# EAGLE board blitzbox (EAGLE 7.2.0)
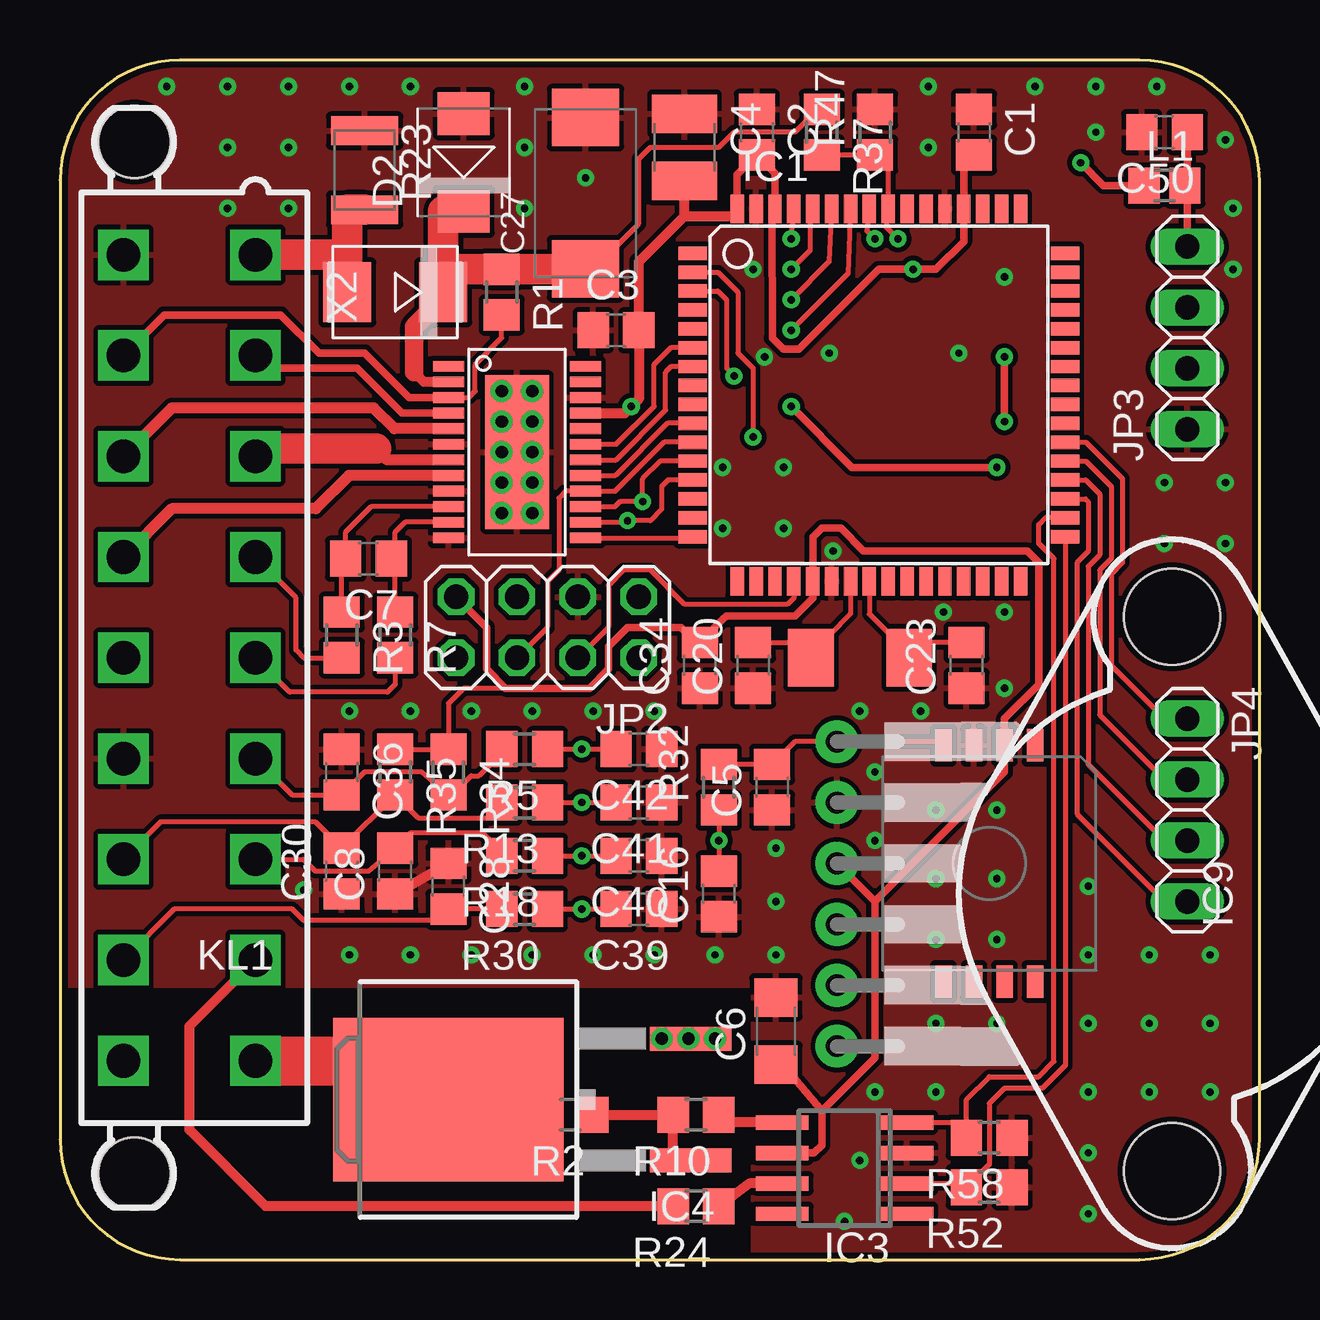
[diagram p0: board, top side]
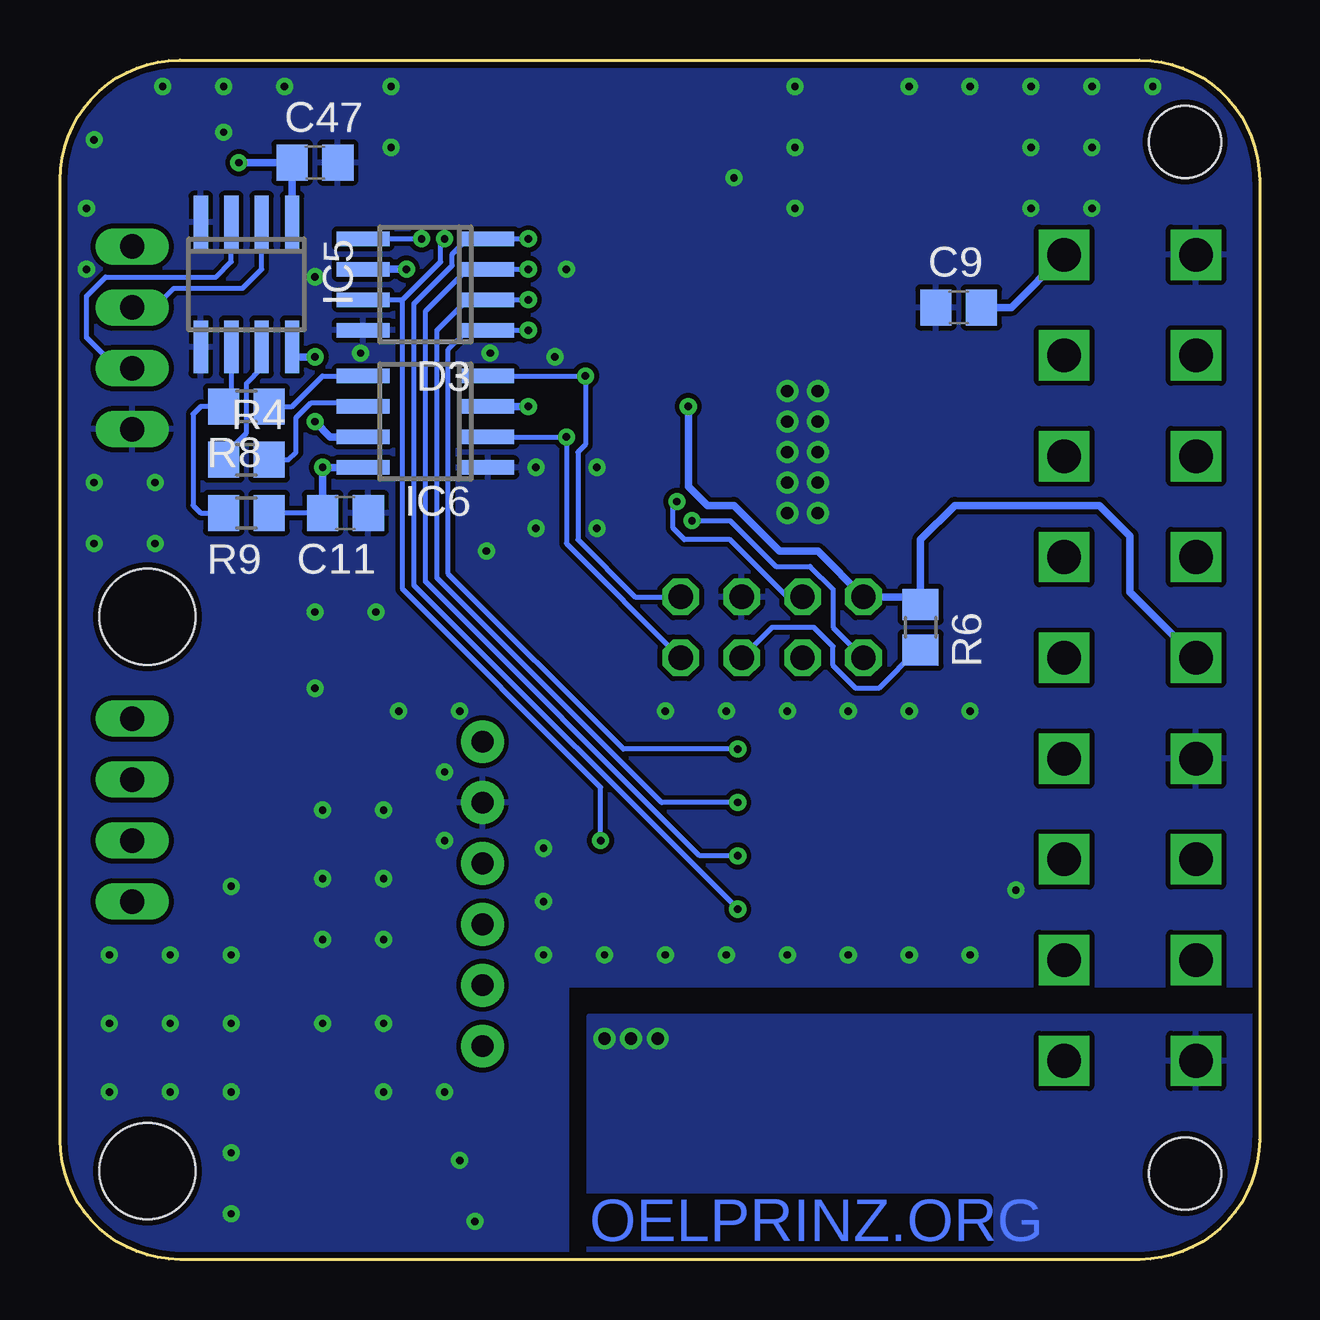
[diagram p1: board, bottom side, seen from below]

Size 50 x 50 mm. Coordinates in mm from the lower left corner, seen from the top.
Outline: 0,45 0,5 arc90 5,0 45,0 arc90 50,5 50,45 arc90 45,50 5,50 arc90 0,45
Copper layers (1*16): Top 0.035mm / dielectric 1.5mm / Bottom 0.035mm
Design rules "default *": minimum track width 8mil, minimum drill 12mil, track to track 8mil, track to pad 8mil, pad to pad 8mil, via to via 8mil, smd to smd 8mil, copper to edge 10mil, drill to drill 10mil, minimum pad ring 10mil, minimum via ring 8mil, stop-mask expansion 4mil, vias tented up to drill 0mil, thermal gap 8mil

## Footprints (pad centres in the part's own frame; a part is rotated, then mirrored left to right if it is on the bottom)
C0805 = smd 1.3 x 1.5: 1 -0.95,0; 2 0.95,0
C1210 = smd 1.6 x 2.7: 1 -1.4,0; 2 1.4,0
C1206 = smd 1.6 x 1.8: 1 -1.4,0; 2 1.4,0
SMC_D = smd 2.4 x 2.8: + -3.15,0; - 3.15,0
MURS120 = smd 2 x 2.5: 1 -2,0; 2 2,0
SMBJ = smd 1.78 x 2.16: A 2.04,0; C -2.03,0
SO08 = smd 0.6 x 2.2: 1 -1.905,-2.6; 2 -0.635,-2.6; 3 0.635,-2.6; 4 1.905,-2.6; 5 1.905,2.6; 6 0.635,2.6; 7 -0.635,2.6; 8 -1.905,2.6
TQFP64 = smd 1.194 x 0.559: 1 -7.76,5.905; 2 -7.76,5.118; 3 -7.76,4.331; 4 -7.76,3.543; 5 -7.76,2.756; 6 -7.76,1.968; 7 -7.76,1.181; 8 -7.76,0.394; 9 -7.76,-0.394; 10 -7.76,-1.181; 11 -7.76,-1.968; 12 -7.76,-2.756; 13 -7.76,-3.543; 14 -7.76,-4.331; 15 -7.76,-5.118; 16 -7.76,-5.905; 33 7.76,-5.905; 34 7.76,-5.118; 35 7.76,-4.331; 36 7.76,-3.543; 37 7.76,-2.756; 38 7.76,-1.968; 39 7.76,-1.181; 40 7.76,-0.394; 41 7.76,0.394; 42 7.76,1.181; 43 7.76,1.968; 44 7.76,2.756; 45 7.76,3.543; 46 7.76,4.331; 47 7.76,5.118; 48 7.76,5.905 | smd 0.559 x 1.194: 17 -5.905,-7.76; 18 -5.118,-7.76; 19 -4.331,-7.76; 20 -3.543,-7.76; 21 -2.756,-7.76; 22 -1.968,-7.76; 23 -1.181,-7.76; 24 -0.394,-7.76; 25 0.394,-7.76; 26 1.181,-7.76; 27 1.968,-7.76; 28 2.756,-7.76; 29 3.543,-7.76; 30 4.331,-7.76; 31 5.118,-7.76; 32 5.905,-7.76; 49 5.905,7.76; 50 5.118,7.76; 51 4.331,7.76; 52 3.543,7.76; 53 2.756,7.76; 54 1.968,7.76; 55 1.181,7.76; 56 0.394,7.76; 57 -0.394,7.76; 58 -1.181,7.76; 59 -1.968,7.76; 60 -2.756,7.76; 61 -3.543,7.76; 62 -4.331,7.76; 63 -5.118,7.76; 64 -5.905,7.76
TLE8080 = smd 0.45 x 1.3: 1 -3.575,-2.85; 2 -2.925,-2.85; 3 -2.275,-2.85; 4 -1.625,-2.85; 5 -0.975,-2.85; 6 -0.325,-2.85; 7 0.325,-2.85; 8 0.975,-2.85; 9 1.625,-2.85; 10 2.275,-2.85; 11 2.925,-2.85; 12 3.575,-2.85; 13 3.575,2.85; 14 2.925,2.85; 15 2.275,2.85; 16 1.625,2.85; 17 0.975,2.85; 18 0.325,2.85; 19 -0.325,2.85; 20 -0.975,2.85; 21 -1.625,2.85; 22 -2.275,2.85; 23 -2.925,2.85; 24 -3.575,2.85 | smd 6.4 x 2.65: 25 0,0
SO-08 = smd 0.6 x 2.2: 1 -1.905,-2.6; 2 -0.635,-2.6; 3 0.635,-2.6; 4 1.905,-2.6; 5 1.905,2.6; 6 0.635,2.6; 7 -0.635,2.6; 8 -1.905,2.6
TO263 = smd 1 x 3.4: 1 -2.54,-6.6; 2 2.54,-6.6 | smd 6.8 x 9.6: 3 0,3.5
MPXH6400 = smd 1.346 x 0.686: 1 -4.921,1.905; 2 -4.921,0.635; 3 -4.921,-0.635; 4 -4.921,-1.905; 5 4.921,-1.905; 6 4.921,-0.635; 7 4.921,0.635; 8 4.921,1.905
MPX4250 = drill 0.9 pad 1.778: 1 -6.35,-13.97; 2 -3.81,-13.97; 3 -1.27,-13.97; 4 1.27,-13.97; 5 3.81,-13.97; 6 6.35,-13.97 | hole 4: 11.555,0; -11.555,0
2X04 = drill 1.016 octagon: 1 -3.81,-1.27; 2 -3.81,1.27; 3 -1.27,-1.27; 4 -1.27,1.27; 5 1.27,-1.27; 6 1.27,1.27; 7 3.81,-1.27; 8 3.81,1.27
1X04 = drill 1.016 long: 1 -3.81,0; 2 -1.27,0; 3 1.27,0; 4 3.81,0
FB805 = smd 1.3 x 1.5: 1 -0.85,0; 2 0.85,0
ABM3 = smd 1.9 x 2.4: 1 -2.05,0; 2 2.05,0
R0805 = smd 1.3 x 1.5: 1 -0.95,0; 2 0.95,0
CT/CN1210 = smd 1.2 x 2.8: 1 -1.65,0; 2 1.65,0
5566-18 = drill 1.4 square: 1 16.8,-2.75; 2 12.6,-2.75; 3 8.4,-2.75; 4 4.2,-2.75; 5 0,-2.75; 6 -4.2,-2.75; 7 -8.4,-2.75; 8 -12.6,-2.75; 9 -16.8,-2.75; 10 16.8,2.75; 11 12.6,2.75; 12 8.4,2.75; 13 4.2,2.75; 14 0,2.75; 15 -4.2,2.75; 16 -8.4,2.75; 17 -12.6,2.75; 18 -16.8,2.75 | hole 3: 21.5,2.29; -21.5,2.29

## Placement (x,y rotation side)
C1  100n  [C0805]  38.1,46.99 270 top
C2  100n  [C0805]  29.05,46.99 270 top
C3  100n  [C0805]  23.18,38.73 0 top
C4  22u  [C1210]  26.04,46.35 270 top
C5  1n  [C0805]  29.69,19.68 90 top
C6  22u  [C1206]  29.84,9.53 90 top
C7  1n  [C0805]  12.86,29.21 180 top
C8  1n  [C0805]  13.97,16.19 90 top
C9  1n  [C0805]  12.54,39.69 0 bottom
C11  100n  [C0805]  38.1,31.11 180 bottom
C16  220n  [C0805]  27.46,15.24 90 top
C20  18p  [C0805]  28.89,24.77 90 top
C23  18p  [C0805]  37.78,24.77 90 top
C27  TAJD336*035#NJ  [SMC_D]  21.91,44.45 90 top
C28  1n  [C0805]  16.19,15.56 270 top
C30  1n  [C0805]  11.75,16.19 90 top
C34  100n  [C0805]  26.67,24.77 90 top
C36  1n  [C0805]  11.75,20.32 270 top
C39  220n  [C0805]  24.13,14.61 180 top
C40  220n  [C0805]  24.13,16.83 180 top
C41  1u  [C0805]  24.13,19.05 180 top
C42  1u  [C0805]  24.13,21.27 180 top
C47  1u  [C0805]  39.37,45.72 0 bottom
C50  1n  [C0805]  46.04,46.99 180 top
D1  MURS120  [MURS120]  13.97,40.32 0 top
D2  SMBJ22A  [SMBJ]  16.83,45.72 90 top
D3  DA112S1  [SO08]  34.77,40.64 90 bottom
IC1  ATMEGA2561-16AU  [TQFP64]  34.13,36.04 0 top
IC2  TLE8080  [TLE8080]  19.05,33.66 270 top
IC3  MCP14E10  [SO-08]  32.7,3.81 90 top
IC4  FGB3056_F085  [TO263]  19.68,6.67 90 top
IC5  USB6B1  [SO08]  42.23,40.64 180 bottom
IC6  PL2303SA  [SO-08]  34.77,34.92 90 bottom
IC8  MPXH6400AC6T1  [MPXH6400]  38.73,16.51 270 top
IC9  MPX4250  [MPX4250]  46.35,15.24 270 top
JP2  [2X04]  20.32,26.35 180 top
JP3  USB  [1X04]  46.99,38.42 90 top
JP4  [1X04]  46.99,18.73 270 top
L1  L0805C100MDWIT  [FB805]  46.04,44.77 0 top
Q1  ABM3-16.000MHZ-D2Y-T  [ABM3]  33.35,25.08 0 top
R1  1k  [R0805]  18.41,40.32 270 top
R2  0R(NC)  [R0805]  21.27,6.03 180 top
R3  10k  [R0805]  11.75,26.04 270 top
R4  27R  [R0805]  42.23,33.34 0 bottom
R5  1k  [R0805]  19.37,21.27 180 top
R6  10k  [R0805]  14.13,26.35 270 bottom
R7  10k  [R0805]  13.97,26.04 270 top
R8  27R  [R0805]  42.23,35.56 180 bottom
R9  1k5*  [R0805]  42.23,31.11 180 bottom
R10  220R  [R0805]  26.51,6.03 180 top
R13  1k  [R0805]  19.37,19.05 180 top
R18  1k  [R0805]  19.37,16.83 180 top
R23  B72530V1140S262  [CT/CN1210]  12.7,45.4 270 top
R24  220R  [R0805]  26.51,2.22 180 top
R30  1k  [R0805]  19.37,14.61 180 top
R32  1k  [R0805]  27.46,19.68 90 top
R34  2k49  [R0805]  16.19,20.32 270 top
R35  2k49  [R0805]  13.97,20.32 270 top
R37  39k  [R0805]  31.75,46.99 270 top
R47  10k  [R0805]  33.97,46.99 90 top
R52  39k  [R0805]  38.73,3.02 180 top
R58  39k  [R0805]  38.73,5.08 180 top
X2  5566-18  [5566-18]  5.4,25.08 90 top

## Library data of the parts
C1-C9 C11 C16 C20 C23 C27 C28 C30 C34 C36 C39-C42 C47 C50 R1-R10 R13 R18 R24 R30 R32 R34 R35 R37 R47 R52 R58 = rcl
D1 = murs120
D2 = diode
D3 = st-microelectronics; MF: Arrow Electronics; MPN: DA112S1; OC_FARNELL: 9802223; OC_NEWARK: 89K0514
IC1 = atmel-2005
IC2 = tle8080
IC3 = mcp14e10
IC4 = FGB3056_F085
IC5 = st-microelectronics; MPN: USB6B1; OC_FARNELL: 9804358; OC_NEWARK: 26M4750
IC6 = PL2303SA
IC8 = MPXH6400
IC9 = mpx4250
JP2-JP4 = pinhead
L1 = dp_devices
Q1 = ABM3
R23 = varistor
X2 = con-molex; OC_FARNELL: unknown; OC_NEWARK: unknown

## Nets
3V3: C11.2 IC6.3 IC6.8 R9.1
!RST: IC1.20 JP2.4 R6.2
+5V: C1.2 C2.2 C3.2 C4.2 C6.1 C34.2 D3.6 IC1.21 IC1.52 IC1.62 IC1.64 IC2.21 IC3.6 IC8.2 IC9.3 JP2.7 R6.1 R34.1 R35.1 X2.14
+5VU: C50.1 JP3.4 L1.2
+12V: C27.+ D1.2 D2.C IC2.2 R1.1 R37.1
+UB: C9.2 D1.1 R23.2 X2.1
AD_BAT: D3.5 IC1.56 R37.2 R47.1
AD_CLT: C42.2 D3.1 IC1.58 R5.1
AD_IAT: C41.2 D3.2 IC1.59 R13.1
AD_MAP: C16.2 D3.7 IC1.57 R32.1
AD_TPS: C39.2 D3.4 IC1.61 R30.1
AD_WBL: C40.2 D3.3 IC1.60 R18.1
BP_OUT: IC2.4 X2.2
CLT: C36.2 R5.2 R34.2 X2.6
CRANK: IC1.16 IC2.13
CS: IC1.10 IC2.17
D+: IC5.3 JP3.2
D-: IC5.2 JP3.3
DA+: IC5.6 R8.2 R9.2
DA-: IC5.7 R4.1
GND: C1.1 C2.1 C3.1 C4.1 C5.1 C6.2 C8.1 C9.1 C11.1 C16.1 C20.1 C23.1 C27.- C28.1 C30.1 C34.1 C36.1 C39.1 C40.1 C41.1 C42.1 C47.2 C50.2 D2.A D3.8 IC1.22 IC1.53 IC1.63 IC2.6 IC2.9 IC2.12 IC2.22 IC2.25 IC3.3 IC5.4 IC5.5 IC6.1 IC8.3 IC9.2 JP2.3 JP3.1 R23.1 R47.2 R52.1 R58.1 X2.10 X2.15
GND1: IC4.2 X2.18
IAT: C30.2 R13.2 R35.2 X2.16
IDV_OUT: IC2.7 X2.3
IGN: IC4.1 R2.1 R10.2
IGNA: IC1.34 IC3.4 R58.2
IGNA_OUT: IC4.3 R2.2 X2.9
IGNB: IC1.33 IC3.2 R52.2
IGNB_OUT: R24.2 X2.8
INJA: IC1.7 IC2.18
INJA_OUT: IC2.8 X2.13
INJB: IC1.6 IC2.19
INJB_OUT: IC2.5 X2.12
MAP: C5.2 IC8.4 IC9.1 R32.2
MISO: IC1.13 IC2.14 JP2.8
MOSI: IC1.12 IC2.15 JP2.5
N$1: C7.1 IC2.11 R7.1
N$2: IC3.5 R10.1
N$5: IC6.6 R4.2
N$6: IC6.5 R8.1
N$7: IC1.38 JP4.1
N$9: IC1.37 JP4.2
N$11: IC1.36 JP4.3
N$12: IC1.35 JP4.4
N$14: C7.2 IC2.10 R3.1
N$22: IC3.7 R24.1
RXD: IC1.2 IC6.2 JP2.2
RXD2: IC1.27
SCK: IC1.11 IC2.16 JP2.6
TACH_OUT: IC2.3 R1.2 X2.11
TPS: C28.2 R30.2 X2.17
TXD: IC1.3 IC6.4 JP2.1
TXD2: IC1.28
VR+: R3.2 X2.4
VR-: R7.2 X2.5
VU: C47.1 IC5.1 L1.1
VUA: IC5.8 IC6.7
WBL: C8.2 R18.2 X2.7
XTAL1: C20.2 IC1.23 Q1.1
XTAL2: C23.2 IC1.24 Q1.2

## Tracks (layer width: path | path; a pad name or v marks a point on that pad's centre or on a via)
3V3  (via drill 0.3)
  Top 0.305: v30.48,35.56 33.02,33.02 v39.05,33.02
  Bottom 0.203: C11.2 R9.1
  Bottom 0.305: IC6.8 v39.05,33.02 C11.2 | IC6.3 v30.48,35.56
!RST
  Top 0.203: JP2.4 22.86,26.35 22.86,28.1 23.5,28.73 24.61,28.73 26.04,27.3 30.32,27.3 30.59,27.57 IC1.20
  Bottom 0.203: R6.2 14.29,25.4 15.88,23.81 16.83,23.81 17.78,24.77 17.78,25.56 18.57,26.35 20.32,26.35 JP2.4
+5V  (via drill 0.3)
  Top 0.203: R35.1 R34.1 16.19,23.18 16.83,23.81 18.57,23.81
  Top 0.305: IC9.3 33.97,14.92 | 33.97,14.92 39.37,20.32 IC8.2 39.37,22.54 40.8,23.97 40.8,29.05 40.32,29.53 33.5,29.53 32.54,30.48 31.75,30.48 31.38,30.11 IC1.21 31.38,27.57 30.64,26.83 27.78,26.83 27.62,26.67 C34.2 26.19,26.04 25.88,26.35 23.65,26.35 22.86,25.56 22.86,24.61 22.07,23.81 18.57,23.81 17.78,24.61 17.78,26.35 JP2.7 | IC3.6 31.43,4.45 31.75,4.76 31.75,6.19 | 24.13,38.41 C3.2 | 31.75,6.19 33.97,8.41 33.97,14.92 | C1.2 37.67,45.62 IC1.52 37.67,42.44 36.51,41.27 v35.56,41.27 34.13,41.27 30.8,37.94 30.16,37.94 29.7,38.41 29.69,43.5 29.8,43.61 IC1.62 29.8,45.29 C2.2 28.23,45.22 IC1.64 28.26,43.76 28.26,43.5 | 31.75,6.19 30.16,8.1 C6.1
  Top 0.406: IC2.21 23.53,35.28 v23.81,35.56 24.13,35.88 C3.2 24.13,41.59 26.04,43.5 | 26.04,43.5 C4.2 | 26.04,43.5 28.26,43.5
  Bottom 0.305: v23.81,35.56 23.81,32.23 23.02,31.43 21.91,31.43 20,29.53 18.41,29.53 JP2.7 14.45,27.62 R6.1 14.13,30 12.7,31.43 6.67,31.43 5.4,30.16 5.4,27.83 X2.14 | D3.6 v35.56,41.27
+5VU
  Top 0.305: JP3.4 46.99,44.66 L1.2 46.99,44.87 C50.1
+12V
  Top 0.203: R37.1 31.59,47.94 30.64,46.99 28.1,46.99 27.46,46.35 24.61,46.35 24.13,45.88 24.13,43.18 22.25,41.3 | C27.+ 22.25,41.3 | 22.25,41.3 22.23,41.27
  Top 0.406: IC2.2 15.17,36.58 14.76,36.99
  Top 0.762: 14.76,36.99 14.76,38.89 15.97,40.1 D1.2
  Top 1.27: D2.C 15.97,43.69 15.97,41.27 | 15.97,41.27 D1.2 | 15.97,41.27 R1.1 21.91,41.27 C27.+
+UB
  Top 1.27: 11.97,39.7 D1.1 11.97,41.88 | R23.2 11.97,43.75 11.97,41.88 | X2.1 11.97,41.88
  Bottom 0.305: C9.2 10.34,39.69 X2.1
AD_BAT  (via drill 0.3)
  Top 0.203: R37.2 R47.1 34.52,45.49 IC1.56 34.42,43.05 v34.92,42.55
  Bottom 0.203: D3.5 v34.92,42.55
AD_CLT  (via drill 0.3)
  Top 0.203: R5.1 v21.75,21.27 C42.2 | IC1.58 32.85,41.1 v30.48,38.73
  Bottom 0.203: v21.75,21.27 26.51,21.27 33.81,28.57 33.81,37.94 33.02,38.73 D3.1 v30.48,38.73
AD_IAT  (via drill 0.3)
  Top 0.203: R13.1 v21.75,19.05 C41.2 | IC1.59 32.06,41.58 v30.48,40.01
  Bottom 0.203: v21.75,19.05 24.92,19.05 34.29,28.42 34.29,38.73 33.02,40.01 D3.2 v30.48,40.01
AD_MAP  (via drill 0.3)
  Top 0.203: IC1.57 33.63,42.88 v33.97,42.55 | R32.1 v27.46,17.46 C16.2
  Bottom 0.203: v27.46,17.46 27.46,19.68 35.72,27.94 35.72,40.01 | D3.7 35.72,40.01 | 35.72,40.01 34.13,41.59 34.13,42.39 v33.97,42.55
AD_TPS  (via drill 0.3)
  Top 0.203: R30.1 v21.75,14.61 C39.2 | IC1.61 30.48,42.86 v30.48,42.55
  Bottom 0.203: v21.75,14.61 35.24,28.1 35.24,39.85 33.66,41.43 33.66,41.91 33.02,42.55 D3.4 v30.48,42.55
AD_WBL  (via drill 0.3)
  Top 0.203: R18.1 v21.75,16.83 C40.2 | v30.48,41.27 31.27,42.07 31.27,43.71 IC1.60
  Bottom 0.203: v21.75,16.83 23.34,16.83 34.77,28.26 34.77,39.53 33.02,41.27 D3.3 v30.48,41.27
BP_OUT
  Top 0.305: IC2.4 14.25,35.28 12.38,37.15 8.68,37.15 X2.2
CLT
  Top 0.203: X2.6 8.17,20.88 9.68,19.37 C36.2 12.7,20.32 15.08,20.32 R34.2 16.35,19.37 17.14,20.16 17.46,20.16 18.42,21.12 R5.2
CRANK
  Top 0.203: IC2.13 26.14,30.08 IC1.16
CS
  Top 0.203: IC2.17 23.16,32.68 25.33,34.85 IC1.10
D+
  Bottom 0.203: JP3.2 47.62,37.15 48.9,38.42 48.9,40.16 48.1,40.96 43.5,40.96 42.86,41.59 IC5.3
D-
  Bottom 0.203: JP3.3 46.04,39.69 45.24,40.48 42.39,40.48 41.59,41.27 IC5.2
DA+
  Bottom 0.203: R9.2 44.13,31.11 44.45,31.43 44.45,35.24 44.13,35.56 R8.2 42.86,35.88 IC5.6
DA-
  Bottom 0.203: R4.1 43.18,33.5 42.23,34.45 42.23,36.51 41.59,37.15 IC5.7
GND  (via drill 0.3, 0.51)
  Top 0.406: C8.1 C28.1
  other vias: 18.41,36.2 19.68,36.2 18.41,34.92 19.68,34.92 19.68,33.66 18.41,33.66 18.41,32.38 19.68,32.38 19.68,31.11 18.41,31.11 6.99,43.81 4.45,48.9 6.99,46.35 6.99,48.9 9.53,48.9 9.53,46.35 12.06,48.9 9.53,43.81 14.61,48.9 19.37,48.9 36.2,48.9 40.64,48.9 43.18,48.9 45.72,48.9 48.58,46.67 48.9,43.81 48.9,41.27 48.58,32.38 48.58,29.84 46.04,29.84 47.94,12.7 47.94,9.84 47.94,6.99 45.4,12.7 42.86,15.56 45.4,9.84 42.86,9.84 46.04,32.38 45.4,6.99 29.84,17.14 29.84,14.92 29.84,12.7 27.3,12.7 24.77,12.7 22.23,12.7 19.68,12.7 17.14,12.7 14.61,12.7 12.06,12.7 24.77,22.86 22.23,22.86 19.68,22.86 14.61,22.86 12.06,22.86 21.91,45.09 19.37,46.35 19.37,43.81 43.18,46.99 36.2,46.35 39.05,18.73 36.51,15.88 39.05,15.88 36.51,13.34 39.05,13.34 36.51,18.73 39.37,23.81 39.37,26.99 33.34,22.86 35.88,22.86 33.97,20.32 33.97,17.46 36.51,9.84 39.05,9.84 36.51,6.99 33.34,4.13 33.97,6.99 42.86,6.99 42.86,4.45 30.16,30.48 32.23,29.53 30.16,33.02 27.62,33.02 27.62,30.48 32.07,37.78 37.47,37.78 39.37,40.96 28.89,41.27 29.37,37.62 36.83,26.99 42.86,12.7 42.86,1.91 10.16,15.4 17.14,22.86 32.7,1.59
  pour Top: 0,50 0,11.43 28.89,11.43 28.89,0 50,0 50,50
  pour Bottom: 0,50 0,11.43 28.89,11.43 28.89,0 50,0 50,50
GND1  (via drill 0.51)
  Top 0.203: IC4.2 v26.19,9.21
  other vias: 27.3,9.21 25.08,9.21
  pour Bottom: -0.32,0 27.94,0 27.94,10.16 -0.32,10.16
IAT
  Top 0.203: X2.16 4.22,18.26 10.63,18.26 C30.2 R35.2 14.93,18.41 18.42,18.41 R13.2
IDV_OUT
  Top 0.457: IC2.7 13.64,33.33 13.17,33.81
  Top 1.27: 13.17,33.81 8.47,33.81 X2.3
IGN
  Top 0.406: IC4.1 25.56,4.13 R10.2 R2.1
IGNA
  Top 0.203: IC3.4 37.78,5.71 37.78,5.4 R58.2 37.78,6.67 38.73,7.62 40.8,7.62 41.43,8.26 41.43,29.21 40.8,29.84 40.8,30.64 41.08,30.92 IC1.34
IGNA_OUT
  Top 0.406: R2.2 18.73,6.03 IC4.3
  Top 2.032: 16.83,6.03 IC4.3 | X2.9 16.12,8.28 16.12,6.1
  Top 3.048: 16.12,6.1 IC4.3
IGNB
  Top 0.203: IC1.33 41.91,30.2 41.91,8.1 40.96,7.14 39.37,7.14 38.73,6.51 38.73,3.97 R52.2 37.63,3.17 IC3.2
IGNB_OUT
  Top 0.406: R24.2 8.57,2.22 5.4,5.4 5.4,9.73 X2.8
INJA
  Top 0.203: IC2.18 23.17,33.33 25.24,35.4 25.24,36.99 25.47,37.22 IC1.7
INJA_OUT
  Top 0.457: IC2.8 12.04,32.68 10.66,31.3 4.67,31.3 X2.13
INJB
  Top 0.203: IC2.19 23.18,33.98 24.77,35.56 24.77,37.31 25.46,38.01 IC1.6
INJB_OUT
  Top 0.457: IC2.5 13.95,34.63 13.08,35.5 4.67,35.5 X2.12
MAP
  Top 0.203: IC8.4 36.67,21.59 IC9.1 30.64,21.59 C5.2 R32.2
MISO  (via drill 0.3)
  Top 0.203: IC2.14 23.59,30.73 v23.65,30.8 24.61,30.8 25.08,31.27 25.08,32.23 25.35,32.49 IC1.13
  Bottom 0.203: v23.65,30.8 22.07,30.8 20.16,28.89 18.73,28.89 17.78,27.94 17.78,26.35 JP2.8
MOSI  (via drill 0.3)
  Top 0.203: IC2.15 23.12,31.38 23.34,31.59 v24.29,31.59 24.29,32.54 25.02,33.28 IC1.12
  Bottom 0.203: JP2.5 19.68,27.62 22.07,30 23.97,30 24.45,30.48 24.45,31.43 v24.29,31.59
N$1
  Top 0.203: R7.1 13.97,29.05 | 13.97,29.05 C7.1 | 13.97,29.05 13.97,30.32 14.38,30.73 IC2.11
N$2
  Top 0.406: IC3.5 27.46,5.71 R10.1
N$5
  Bottom 0.203: R4.2 40.48,33.34 40.16,33.66 40.16,35.08 39.53,35.72 37.52,35.72 IC6.6
N$6
  Bottom 0.203: R8.1 40.32,35.56 39.05,36.83 IC6.5
N$7
  Top 0.203: JP4.1 46.04,22.54 43.81,24.77 43.81,28.57 44.29,29.05 44.29,32.54 42.77,34.07 IC1.38
N$9
  Top 0.203: JP4.2 46.04,20 43.34,22.7 43.34,28.73 43.81,29.21 43.81,32.23 42.76,33.28 IC1.37
N$11
  Top 0.203: JP4.3 46.04,17.46 42.86,20.64 42.86,28.89 43.34,29.37 43.34,31.91 42.76,32.49 IC1.36
N$12
  Top 0.203: JP4.4 46.04,14.92 42.39,18.57 42.39,29.05 42.86,29.53 42.86,31.59 42.75,31.71 IC1.35
N$14
  Top 0.203: R3.1 11.75,29.05 C7.2 11.91,30.32 12.96,31.38 IC2.10
N$22
  Top 0.406: IC3.7 28.73,3.17 R24.1
RXD  (via drill 0.3)
  Top 0.203: v28.89,34.29 28.89,37.15 28.26,37.78 28.26,40.32 27.43,41.15 IC1.2
  Bottom 0.203: IC6.2 v28.89,34.29 28.89,29.84 JP2.2
SCK
  Top 0.203: JP2.6 20.32,26.35 20.32,28.26 20.8,28.73 20.8,31.75 21.08,32.03 IC2.16 23.14,32.03 25.18,34.07 IC1.11
TACH_OUT
  Top 0.203: IC2.3 17.04,35.93 17.3,36.2 17.3,37.31 18.41,38.42 R1.2
  Top 0.305: IC2.3 14.55,35.93 12.7,37.78 10.79,37.78 9.21,39.37 4.33,39.37 X2.11
TPS
  Top 0.203: 18.41,13.97 R30.2 C28.2 16.19,14.13 10.16,14.13 9.68,14.61 4.77,14.61 X2.17
TXD  (via drill 0.3)
  Top 0.203: v28.1,36.83 27.78,37.15 27.78,40.01 27.42,40.37 IC1.3
  Bottom 0.203: IC6.4 v28.1,36.83 28.1,33.97 28.42,33.66 28.42,30 26.04,27.62 JP2.1
VR+
  Top 0.203: R3.2 10.16,25.08 9.84,25.4 9.84,27.59 X2.4
VR-
  Top 0.203: R7.2 13.97,23.97 13.65,23.65 9.58,23.65 X2.5
VU  (via drill 0.3)
  Top 0.305: L1.1 43.5,44.77 v42.55,45.72
  Bottom 0.305: IC5.1 C47.1 v42.55,45.72
VUA  (via drill 0.3)
  Top 0.305: v39.37,34.92 v39.37,37.62
  Bottom 0.305: IC5.8 40.32,37.62 v39.37,37.62 | IC6.7 38.73,34.29 v39.37,34.92
WBL
  Top 0.203: X2.7 10.15,16.68 10.64,16.19 12.86,16.19 C8.2 14.61,17.78 17.62,17.78 18.42,16.98 R18.2
XTAL1
  Top 0.203: C20.2 30.51,25.71 Q1.1 31.3,25.27 31.75,25.72 32.07,26.04 32.95,26.92 IC1.23
XTAL2
  Top 0.203: C23.2 35.72,25.71 | 35.72,25.71 Q1.2 | IC1.24 33.74,26.91 35.12,25.53 35.63,25.53 35.72,25.62 35.72,25.71

## Text on the board
Bottom: OELPRINZ.ORG
tNames: KL1